# Altium PCB slave_card_pcb.PcbDoc (part 2 of 2)
Units mm, origin at the board's own origin, x right, y up, seen from the top; angles counter-clockwise.
Board outline 165 x 187.5 mm, 4 copper layers (Top Layer, Int1 (GND), Int2 (PWR), Bottom Layer), stack 1.369 mm thick; 87 components, 83 nets, 381 pads, 109 vias.
Unrouted connection lines stored in the file: 1.
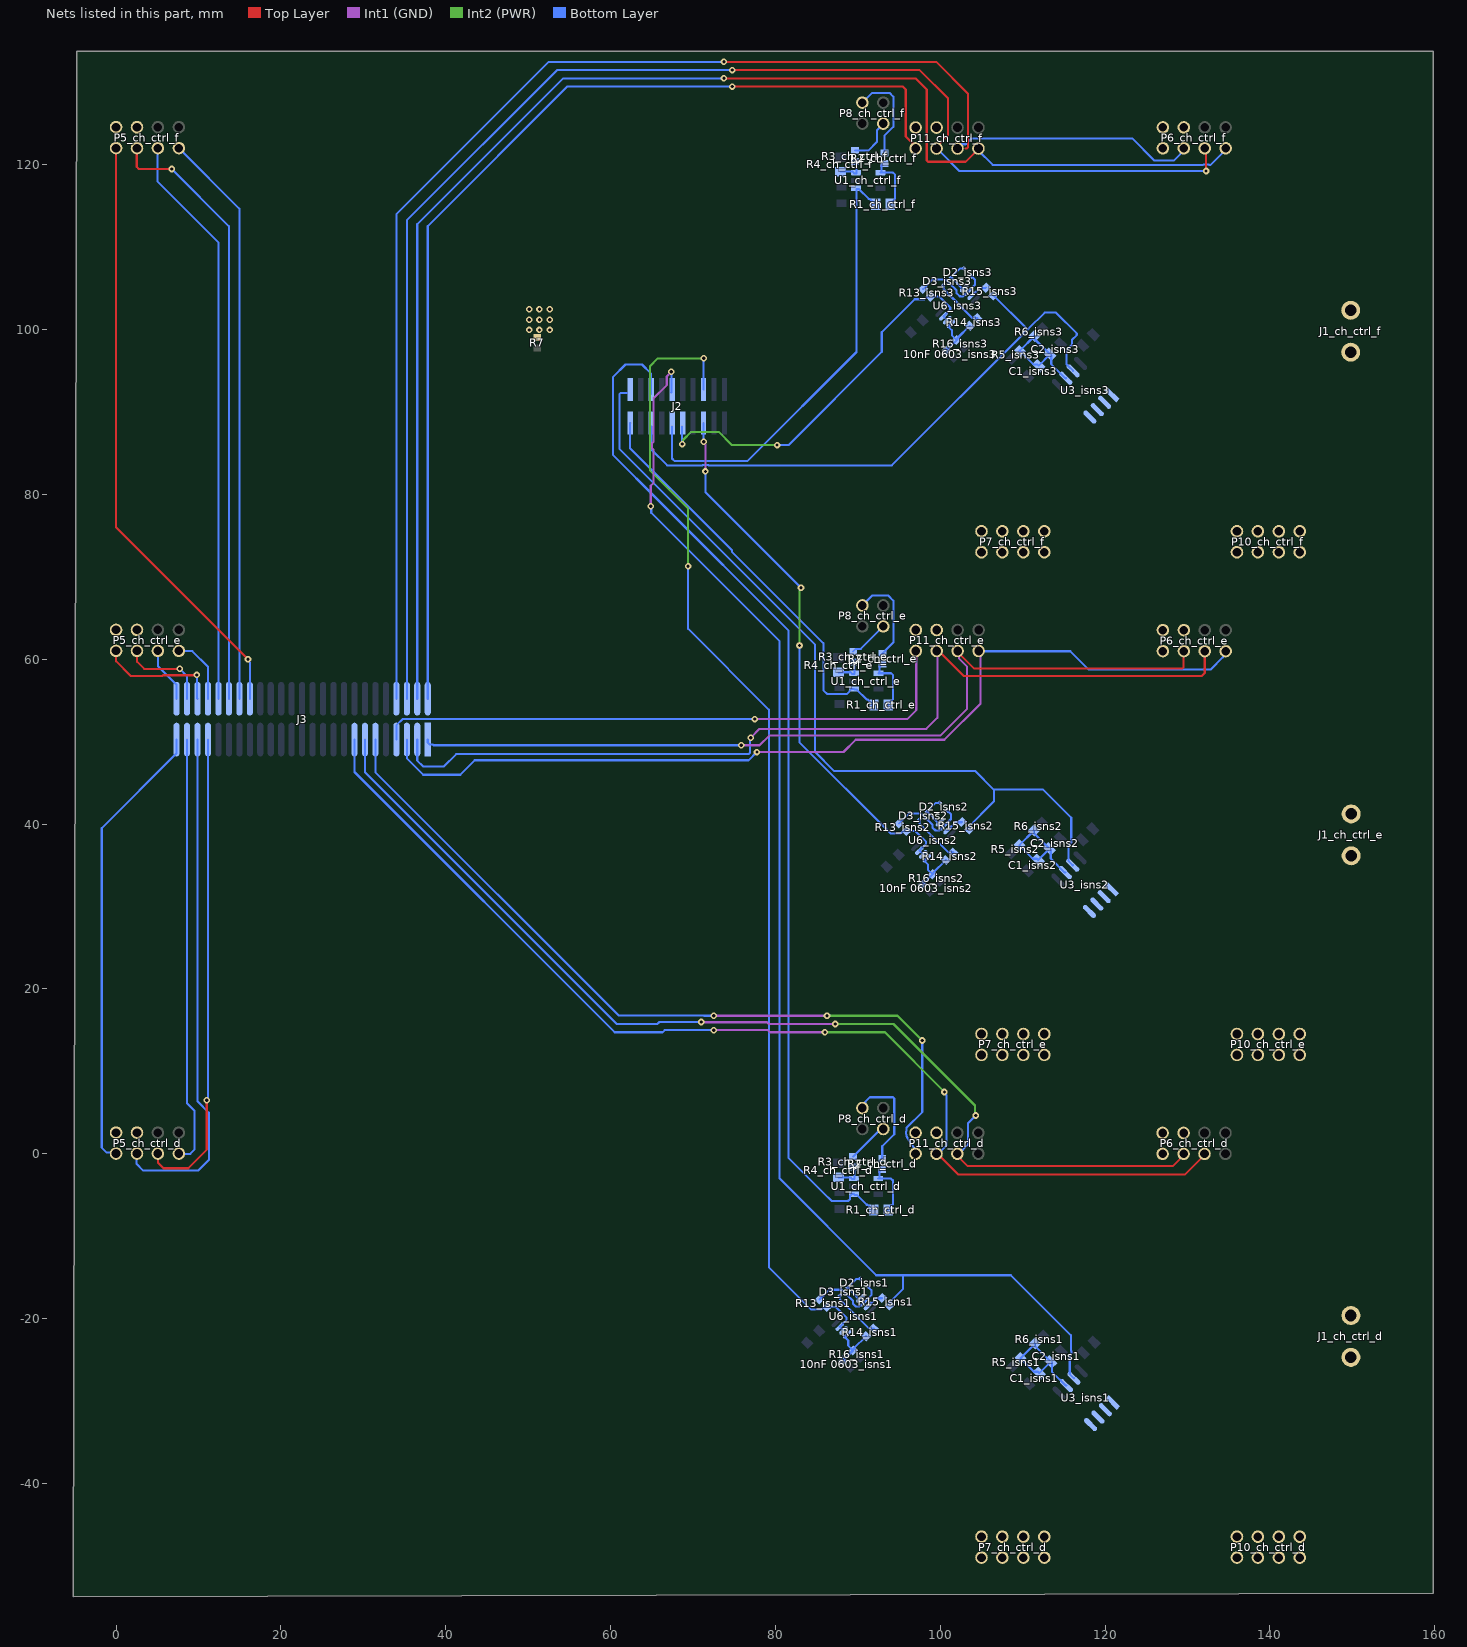
[diagram p4: the nets of this part, all layers, seen from the top]

## Via types
v1: diameter 0.8, hole 0.4, Top Layer to Bottom Layer, 97 vias
v2: diameter 0.8, hole 0.4, Top Layer to Bottom Layer, tented both sides, 12 vias

## Nets (pads, with @x,y where several pads share a name; then routed paths per layer and width w, separated by ;. In a path a pad name is that pad's centre, name@x,y a point inside that pad or via, vN(x,y) a via of type N, cw(c..) or ccw(c..) an arc to the next point about the centre after c; other vN are vias at no path point) (continued)
brdg_en_che: J3.3 P6_ch_ctrl_e.1 P11_ch_ctrl_e.1 | length 114.9
  Int1 (GND) w0.254: v1(77.75,48.75) 88.25,48.75 89.742,50.242 100.492,50.242 104.893,54.643 104.893,60.236 104.891,60.238 104.891,61.069 P11_ch_ctrl_e.1@104.893,61.071
  Bottom Layer w0.254: J3.3@35.27,50.27 35.27,47.98 37.25,46 41.75,46 43.5,47.75 76.75,47.75 v1(77.75,48.75) ; P11_ch_ctrl_e.1@104.837,60.98 115.77,60.98 118,58.75 132.795,58.75 134.284,60.239 134.284,60.309 135.002,61.027 P6_ch_ctrl_e.1@135.072,61.027
brdg_en_chf: J3.49 P6_ch_ctrl_f.1 P11_ch_ctrl_f.1 | length 175.5
  Top Layer w0.254: v1(73.75,130.5) 97,130.5 98.359,129.141 98.359,120.527 98.508,120.378 103.08,120.378 P11_ch_ctrl_f.1@105.064,122.363
  Bottom Layer w0.254: J3.49@36.54,55.22 36.54,112.79 54.25,130.5 v1(73.75,130.5) ; P11_ch_ctrl_f.1@104.559,121.803 106.362,120 131.895,120 131.927,120.031 132.573,120.031 132.601,120.004 132.811,120.004 P6_ch_ctrl_f.1@134.954,122.146
brgd_h_chd: J3.8 P6_ch_ctrl_d.3 P11_ch_ctrl_d.5 | length 134.8
  Top Layer w0.254: P11_ch_ctrl_d.5@99.678,-0.029 102.149,-2.5 129.708,-2.5 P6_ch_ctrl_d.3@132.464,0.256
  Int1 (GND) w0.254: v1(72.5,15) 79.073,15 79.323,14.75 v1(86,14.75)
  Int2 (PWR) w0.254: v1(86,14.75) 93.295,14.75 100.5,7.545 v1(100.5,7.5)
  Bottom Layer w0.254: J3.8@28.92,50.27 28.92,46.33 60.5,14.75 66.301,14.75 66.551,15 v1(72.5,15) ; P11_ch_ctrl_d.5@99.802,0.049 100.773,1.019 100.773,7.08 100.5,7.352 v1(100.5,7.5)
brgd_h_che: J3.2 P6_ch_ctrl_e.3 P11_ch_ctrl_e.5 | length 113.7
  Top Layer w0.254: P11_ch_ctrl_e.5@99.9,60.924 102.824,58 131.75,58 132.087,58.337 P6_ch_ctrl_e.3@132.087,61.041
  Int1 (GND) w0.254: v1(77,50.5) 78.066,51.566 98.316,51.566 99.644,52.894 P11_ch_ctrl_e.5@99.644,60.961
  Bottom Layer w0.254: J3.2@36.54,50.27 36.54,47.71 37.25,47 39.75,47 41.25,48.5 76.75,48.5 76.9,48.65 76.9,50.4 v1(77,50.5)
brgd_h_chf: J3.48 P6_ch_ctrl_f.3 P11_ch_ctrl_f.5 | length 176
  Top Layer w0.254: v1(74.75,131.5) 97.5,131.5 100.947,128.053 100.947,123.604 99.55,122.207 P11_ch_ctrl_f.5@99.55,121.987 ; v1(132.25,119.25) P6_ch_ctrl_f.3@132.25,121.994
  Bottom Layer w0.254: J3.48@35.27,55.22 35.27,113.27 53.5,131.5 v1(74.75,131.5) ; P11_ch_ctrl_f.5@100.048,122.225 99.975,122.152 99.975,121.583 102.308,119.25 v1(132.25,119.25)
brgd_l_chd: J3.7 P6_ch_ctrl_d.5 P11_ch_ctrl_d.3 | length 131
  Top Layer w0.254: P11_ch_ctrl_d.3@101.882,-0.037 103.345,-1.5 128.198,-1.5 P6_ch_ctrl_d.5@129.868,0.17
  Int1 (GND) w0.254: v1(71,16) 71.031,15.969 78.979,15.969 79.198,15.75 v1(87.25,15.75)
  Int2 (PWR) w0.254: v1(87.25,15.75) 94.319,15.75 104.213,5.856 104.213,4.755 v1(104.318,4.651)
  Bottom Layer w0.254: J3.7@30.19,50.27 30.19,46.31 60.75,15.75 65.676,15.75 65.926,16 v1(71,16) ; P11_ch_ctrl_d.3@102.269,0.017 103.353,1.101 103.353,3.686 v1(104.318,4.651)
brgd_l_che: J3.1 P6_ch_ctrl_e.5 P11_ch_ctrl_e.3 | length 106
  Top Layer w0.254: P11_ch_ctrl_e.3@102.44,61.356 102.44,60.56 104.128,58.872 129.38,58.872 129.529,59.021 P6_ch_ctrl_e.5@129.529,61.098
  Int1 (GND) w0.254: v1(75.866,49.571) 78.071,49.571 79.25,50.75 100,50.75 103.25,54 103.25,59.115 102.281,60.085 102.281,60.847 P11_ch_ctrl_e.3@102.108,61.02
  Bottom Layer w0.254: J3.1@37.81,50.27 37.81,49.911 38.053,49.668 38.412,49.668 38.509,49.571 v1(75.866,49.571)
brgd_l_chf: J3.47 P6_ch_ctrl_f.5 P11_ch_ctrl_f.3 | length 174.4
  Top Layer w0.254: v1(73.75,132.5) 99.5,132.5 103.341,128.659 103.341,122.136 103.192,121.987 103.09,121.987
  Bottom Layer w0.254: J3.47@34,55.22 34,114 52.5,132.5 v1(73.75,132.5) ; P11_ch_ctrl_f.3@102.09,121.987 102.602,122.499 103.013,122.499 103.054,122.499 103.093,122.512 ccw(c103.013,122.753) 103.223,122.61 cw(c105.085,121.353) 103.624,123.06 ccw(c103.458,123.252) 103.65,123.085 cw(c103.978,122.799) 103.767,123.18 cw(c103.889,122.958) 103.889,123.212 123.296,123.212 126,120.508 128.309,120.508 P6_ch_ctrl_f.5@129.937,122.135
buck_en_ch_ctrl_d: J3.24 P5_ch_ctrl_d.1 | length 52.2
  Bottom Layer w0.254: P5_ch_ctrl_d.1@7.62,0 9,0 9.5,0.5 9.5,5.25 8.6,6.15 J3.24@8.6,50.27
buck_en_ch_ctrl_e: J3.29 P5_ch_ctrl_e.1 | length 8.2
  Bottom Layer w0.254: P5_ch_ctrl_e.1@7.62,61 9.25,61 11.14,59.11 J3.29@11.14,55.22
buck_en_ch_ctrl_f: J3.32 P5_ch_ctrl_f.1 | length 69.8
  Bottom Layer w0.254: P5_ch_ctrl_f.1@7.62,122 14.95,114.67 J3.32@14.95,55.22
buck_h_ch_ctrl_d: J3.22 P5_ch_ctrl_d.3 | length 58
  Top Layer w0.254: P5_ch_ctrl_d.3@5.08,0 5.08,-1.08 5.75,-1.75 8.75,-1.75 11,0.5 v1(11,6.5)
  Bottom Layer w0.254: v1(11,6.5) 11.14,6.64 J3.22@11.14,50.27
buck_h_ch_ctrl_e: J3.26 P5_ch_ctrl_e.3 | length 6.7
  Bottom Layer w0.254: P5_ch_ctrl_e.3@5.08,61 5.08,59.17 7.33,56.92 J3.26@7.33,55.22
buck_h_ch_ctrl_f: J3.30 P5_ch_ctrl_f.3 | length 69.9
  Bottom Layer w0.254: P5_ch_ctrl_f.3@5.08,122 5,121.92 5,118 12.41,110.59 J3.30@12.41,55.22
buck_l_ch_ctrl_d: J3.23 P5_ch_ctrl_d.5 | length 62.4
  Bottom Layer w0.254: P5_ch_ctrl_d.5@2.54,0 2.484,-0.056 2.484,-1.234 3.25,-2 10,-2 11.25,-0.75 11.25,5 9.87,6.38 J3.23@9.87,50.27
buck_l_ch_ctrl_e: J3.27 P5_ch_ctrl_e.5 | length 10.8
  Top Layer w0.254: P5_ch_ctrl_e.5@2.54,61 2.54,59.71 3.398,58.852 v1(7.716,58.852)
  Bottom Layer w0.254: v1(7.716,58.852) 8.6,57.967 J3.27@8.6,55.22
buck_l_ch_ctrl_f: J3.31 P5_ch_ctrl_f.5 | length 73.8
  Top Layer w0.254: P5_ch_ctrl_f.5@2.54,122 2.5,121.96 2.5,119.75 2.75,119.5 v1(6.75,119.5)
  Bottom Layer w0.254: v1(6.75,119.5) 13.68,112.57 J3.31@13.68,55.22
buck_state_ch_ctrl_d: J3.25 P5_ch_ctrl_d.7 | length 55.3
  Bottom Layer w0.254: P5_ch_ctrl_d.7@0,0 -0.143,0.143 -1.143,0.143 -1.75,0.75 -1.75,39.515 7.33,48.595 J3.25@7.33,50.27
buck_state_ch_ctrl_e: J3.28 P5_ch_ctrl_e.7 | length 14.7
  Top Layer w0.254: P5_ch_ctrl_e.7@0,61 0,59.75 1.75,58 5.641,58 5.711,58.071 9.75,58.071 v1(9.786,58.107)
  Bottom Layer w0.254: v1(9.786,58.107) 9.828,58.065 9.828,55.262 J3.28@9.87,55.22
buck_state_ch_ctrl_f: J3.33 P5_ch_ctrl_f.7 | length 73.5
  Top Layer w0.254: P5_ch_ctrl_f.7@0,122 0,76 v1(16,60)
  Bottom Layer w0.254: v1(16,60) 16,59.852 16.22,59.632 J3.33@16.22,55.22
GND: P5_ch_ctrl_d.6 P5_ch_ctrl_d.8 P5_ch_ctrl_e.6 P5_ch_ctrl_e.8 P5_ch_ctrl_f.6 P5_ch_ctrl_f.8 P6_ch_ctrl_d.6 P6_ch_ctrl_d.8 P6_ch_ctrl_e.6 P6_ch_ctrl_e.8 P6_ch_ctrl_f.6 P6_ch_ctrl_f.8 P11_ch_ctrl_d.6 P11_ch_ctrl_d.8 P11_ch_ctrl_e.6 P11_ch_ctrl_e.8 P11_ch_ctrl_f.6 P11_ch_ctrl_f.8 R7.2
  other v1: 50.11,99.97 51.36,99.97 52.61,99.97 50.11,101.22 51.36,101.22 52.61,101.22 50.11,102.47 51.36,102.47 52.61,102.47
i_sense_isns1: J2.11 R15_isns1.1 U3_isns1.7 | length 161.2
  Int1 (GND) w0.254: v1(64.871,78.562) 64.871,81.058 65.185,81.372 65.185,85.447 65.03,85.602 65.03,86.249 65.185,86.403 65.185,91.645 66.81,93.27 66.81,94.317 67.351,94.857 v1(67.351,94.88)
  Bottom Layer w0.254: v1(64.871,78.562) 64.933,78.5 64.933,77.781 80.5,62.214 80.5,-3 92.23,-14.73 95.5,-14.73 ; J2.11@67.351,92.364 67.405,92.419 67.405,94.826 v1(67.351,94.88) ; R15_isns1.1@93.869,-18.414 93.869,-17.992 95.5,-16.362 95.5,-14.73 ; U3_isns1.7@116.208,-27.232 115.713,-26.737 115.713,-24.444 115.907,-24.25 115.907,-23.934 115.85,-23.877 115.85,-22.02 108.56,-14.73 95.5,-14.73
i_sense_isns2: J2.19 R15_isns2.1 U3_isns2.7 | length 101.1
  Bottom Layer w0.254: 62,92.334 61.209,92.334 61.06,92.185 61.06,85.537 84.81,61.787 84.81,48.756 87.091,46.476 104.219,46.476 106.5,44.195 ; R15_isns2.1@103.523,39.351 103.399,39.351 103.25,39.5 106.5,42.75 106.5,44.195 ; U3_isns2.7@116.07,35.02 115.575,35.515 115.575,37.406 115.893,37.723 115.893,40.785 112.483,44.195 106.5,44.195
i_sense_isns3: J2.16 R15_isns3.1 U3_isns3.7 | length 75.3
  Bottom Layer w0.254: J2.16@64.946,88.249 64.946,85.461 66.873,83.534 71.129,83.534 71.176,83.581 71.823,83.581 71.871,83.534 94.124,83.534 110.607,100.017 110.695,100.105 ; R15_isns3.1@106.442,104.182 110.519,100.105 110.695,100.105 ; U3_isns3.7@116.127,95.008 115.565,95.57 115.56,95.57 115.31,95.82 115.31,97.475 115.985,98.15 115.985,98.77 116.555,99.34 116.555,99.55 114.035,102.07 112.66,102.07 110.695,100.105
i_sense_peak_d: J2.5 R13_isns1.2 U6_isns1.6 U6_isns1.7 | length 140.2
  Int2 (PWR) w0.254: v1(69.4,71.3) 69.4,78.3 64.8,82.9 64.8,95.6 65.717,96.517 71.036,96.517 v1@71.1,96.58
  Bottom Layer w0.254: v1(69.4,71.3) 69.4,63.7 79.2,53.9 79.2,-13.771 84.331,-18.902 85.535,-18.902 85.847,-18.591 R13_isns1.2@86.268,-18.591 86.303,-18.555 86.725,-18.555 86.76,-18.591 87.329,-18.591 88.637,-19.899 88.637,-20.155 U6_isns1.7@87.846,-20.946 ; J2.5@71.27,92.73 71.279,92.739 71.279,96.507 v1(71.288,96.517) ; U6_isns1.7@87.806,-20.977 87.815,-20.977 U6_isns1.7@87.846,-20.946 ; U6_isns1.6@88.266,-21.437 87.846,-21.017 U6_isns1.7@87.846,-20.946
i_sense_peak_e: J2.6 R13_isns2.2 U6_isns2.6 U6_isns2.7 | length 66.5
  Int1 (GND) w0.254: v1(71.282,86.406) 71.282,86.258 71.5,86.04 v1(71.5,82.8)
  Int2 (PWR) w0.254: v1(82.914,61.675) 82.914,68.514 v1(83.1,68.7)
  Bottom Layer w0.254: J2.6@71.27,88.666 71.276,88.66 71.276,86.412 v1(71.282,86.406) ; v1(71.5,82.8) 71.5,80.3 v1(83.1,68.7) ; v1(82.914,61.675) 82.9,61.689 82.9,49.948 93.984,38.863 95.189,38.863 95.5,39.175 R13_isns2.2@95.922,39.175 95.957,39.21 96.378,39.21 96.414,39.175 96.982,39.175 98.29,37.866 98.29,37.61 U6_isns2.7@97.499,36.819 ; U6_isns2.7@97.46,36.788 97.468,36.788 U6_isns2.7@97.499,36.819 ; U6_isns2.6@97.919,36.329 97.499,36.749 U6_isns2.7@97.499,36.819
i_sense_peak_f: J2.10 R13_isns3.2 U6_isns3.6 U6_isns3.7 | length 47.7
  Int2 (PWR) w0.254: v1(68.688,86.117) 68.789,86.217 68.789,86.613 69.776,87.6 73.1,87.6 74.7,86 v1(80.2,86)
  Bottom Layer w0.254: J2.10@68.665,88.256 68.665,86.14 v1(68.688,86.117) ; v1(80.2,86) 81.6,86 92.9,97.3 92.9,99.691 96.903,103.694 98.108,103.694 98.419,104.005 R13_isns3.2@98.841,104.005 98.876,104.041 99.298,104.041 99.333,104.005 99.901,104.005 101.21,102.697 101.21,102.441 U6_isns3.7@100.418,101.65 ; U6_isns3.7@100.379,101.619 100.387,101.619 U6_isns3.7@100.418,101.65 ; U6_isns3.6@100.838,101.159 100.418,101.579 U6_isns3.7@100.418,101.65
lega_chd_state: P6_ch_ctrl_d.7
lega_che_state: P6_ch_ctrl_e.7
lega_chf_state: P6_ch_ctrl_f.7
legb_chd_state: J3.6 P11_ch_ctrl_d.7 | length 99
  Int1 (GND) w0.254: v1(72.5,16.75) v1(86.25,16.75)
  Int2 (PWR) w0.254: v1(86.25,16.75) 94.813,16.75 v1(97.81,13.753)
  Bottom Layer w0.254: J3.6@31.46,50.27 31.46,46.29 60.969,16.781 71.323,16.781 71.355,16.75 v1(72.5,16.75) ; 95.956,2.051 95.89,2.118 95.89,2.274 cw(c96.999,2.549) 95.89,2.824 95.89,3.14 97.81,5.06 v1(97.81,13.753) ; 95.957,2.05 95.984,2.024 ccw(c103.258,5.788) 97.357,0.108 97.357,-0.001 P11_ch_ctrl_d.7@97.467,-0.004
legb_che_state: J3.4 P11_ch_ctrl_e.7 | length 72.8
  Int1 (GND) w0.254: v1(77.5,52.75) 96,52.75 97.081,53.831 P11_ch_ctrl_e.7@97.081,61.057
  Bottom Layer w0.254: J3.4@34,50.27 34,52 34.75,52.75 v1(77.5,52.75)
legb_chf_state: J3.50 P11_ch_ctrl_f.7 | length 130.6
  Top Layer w0.254: v1(74.75,129.5) 95.459,129.5 95.81,129.148 95.81,123.44 97.263,121.987 P11_ch_ctrl_f.7@97.01,121.987 P11_ch_ctrl_f.7@96.914,121.987
  Bottom Layer w0.254: J3.50@37.81,55.22 37.81,112.56 54.75,129.5 v1(74.75,129.5)
"Net10nF 0603_isns1_2": "10nF 0603_isns1.2" R14_isns1.2 R16_isns1.2 U6_isns1.5 | length 6.6
  Bottom Layer w0.254: 88.177,-25.096 R16_isns1.2@89.415,-23.858 ; U6_isns1.5@88.725,-21.896 88.469,-22.153 88.469,-22.281 88.833,-22.645 88.833,-23.277 R16_isns1.2@89.415,-23.858 ; R14_isns1.2@91.006,-22.126 89.521,-23.611 89.521,-23.752 R16_isns1.2@89.415,-23.858
"Net10nF 0603_isns2_2": "10nF 0603_isns2.2" R14_isns2.2 R16_isns2.2 U6_isns2.5 | length 6.6
  Bottom Layer w0.254: 97.831,32.669 R16_isns2.2@99.068,33.907 ; U6_isns2.5@98.379,35.869 98.122,35.612 98.122,35.484 98.487,35.12 98.487,34.488 R16_isns2.2@99.068,33.907 ; R14_isns2.2@100.659,35.639 99.174,34.154 99.174,34.013 R16_isns2.2@99.068,33.907
"Net10nF 0603_isns3_2": "10nF 0603_isns3.2" R14_isns3.2 R16_isns3.2 U6_isns3.5 | length 6.6
  Bottom Layer w0.254: 100.75,97.5 R16_isns3.2@101.987,98.737 ; U6_isns3.5@101.298,100.7 101.041,100.443 101.041,100.315 101.406,99.95 101.406,99.319 R16_isns3.2@101.987,98.737 ; R14_isns3.2@103.578,100.47 102.094,98.985 102.094,98.844 R16_isns3.2@101.987,98.737
NetC1_isns1_1: C1_isns1.1 C2_isns1.2 R5_isns1.1 R6_isns1.2 U3_isns1.6 | length 14.2
  Bottom Layer w0.254: U3_isns1.6@115.31,-28.13 115.252,-28.13 113.546,-26.424 113.546,-25.4 C2_isns1.2@113.387,-25.241 ; C2_isns1.2@113.387,-25.241 111.513,-23.367 R6_isns1.2@111.513,-23.014 R5_isns1.1@109.728,-24.799 111.372,-26.443 111.867,-26.443 C1_isns1.1@112.026,-26.603 C2_isns1.2@113.387,-25.241
NetC1_isns2_1: C1_isns2.1 C2_isns2.2 R5_isns2.1 R6_isns2.2 U3_isns2.6 | length 14.2
  Bottom Layer w0.254: U3_isns2.6@115.172,34.122 115.115,34.122 113.409,35.828 113.409,36.852 C2_isns2.2@113.25,37.011 ; C2_isns2.2@113.25,37.011 111.376,38.884 R6_isns2.2@111.376,39.238 R5_isns2.1@109.59,37.453 111.234,35.809 111.729,35.809 C1_isns2.1@111.888,35.649 C2_isns2.2@113.25,37.011
NetC1_isns3_1: C1_isns3.1 C2_isns3.2 R5_isns3.1 R6_isns3.2 U3_isns3.6 | length 14.2
  Bottom Layer w0.254: U3_isns3.6@115.228,94.11 115.171,94.11 113.465,95.816 113.465,96.84 C2_isns3.2@113.306,96.999 ; C2_isns3.2@113.306,96.999 C1_isns3.1@111.944,95.638 111.785,95.797 111.29,95.797 R5_isns3.1@109.646,97.441 R6_isns3.2@111.432,99.226 111.432,98.873 C2_isns3.2@113.306,96.999
NetD2_isns1_1: D2_isns1.1 D3_isns1.2 U6_isns1.1 | length 4.2
  Bottom Layer w0.254: D2_isns1.1@90.291,-15.189 90.263,-15.161 90.16,-15.161 90.132,-15.189 89.811,-15.189 D3_isns1.2@88.75,-16.25 90.118,-17.618 90.246,-17.618 U6_isns1.1@90.316,-17.548
NetD2_isns1_2: D2_isns1.2 R13_isns1.1 U6_isns1.2 | length 9.6
  Bottom Layer w0.254: R13_isns1.1@85.349,-17.671 86.529,-16.491 88.06,-16.491 89.41,-17.841 89.41,-18.182 89.768,-18.54 90.19,-18.54 90.723,-18.007 U6_isns1.2@90.776,-18.007 91.642,-17.141 91.642,-16.54 D2_isns1.2@91.225,-16.123
NetD2_isns2_1: D2_isns2.1 D3_isns2.2 U6_isns2.1 | length 4.2
  Bottom Layer w0.254: D2_isns2.1@99.945,42.576 99.917,42.604 99.813,42.604 99.785,42.576 99.464,42.576 D3_isns2.2@98.404,41.515 99.771,40.147 99.899,40.147 U6_isns2.1@99.97,40.218
NetD2_isns2_2: D2_isns2.2 R13_isns2.1 U6_isns2.2 | length 9.6
  Bottom Layer w0.254: R13_isns2.1@95.002,40.094 96.182,41.274 97.713,41.274 99.063,39.924 99.063,39.584 99.422,39.225 99.843,39.225 100.376,39.758 U6_isns2.2@100.429,39.758 101.296,40.624 101.296,41.225 D2_isns2.2@100.878,41.642
NetD2_isns3_1: D2_isns3.1 D3_isns3.2 U6_isns3.1 | length 4.2
  Bottom Layer w0.254: D2_isns3.1@102.864,107.407 102.836,107.435 102.733,107.435 102.704,107.407 102.383,107.407 D3_isns3.2@101.323,106.346 102.691,104.978 102.819,104.978 U6_isns3.1@102.889,105.048
NetD2_isns3_2: D2_isns3.2 R13_isns3.1 U6_isns3.2 | length 9.6
  Bottom Layer w0.254: R13_isns3.1@97.922,104.925 99.102,106.105 100.633,106.105 101.982,104.755 101.982,104.414 102.341,104.056 102.763,104.056 103.296,104.589 U6_isns3.2@103.349,104.589 104.215,105.455 104.215,106.056 D2_isns3.2@103.798,106.473
NetD3_isns1_1: D3_isns1.1 R14_isns1.1 | length 6.1
  Bottom Layer w0.254: D3_isns1.1@87.817,-17.183 87.788,-17.212 87.788,-17.315 87.817,-17.343 87.817,-17.661 91.327,-21.171 91.89,-21.171 R14_isns1.1@91.925,-21.207
NetD3_isns2_1: D3_isns2.1 R14_isns2.1 | length 6.1
  Bottom Layer w0.254: D3_isns2.1@97.47,40.582 97.442,40.553 97.442,40.45 97.47,40.422 97.47,40.104 100.98,36.594 101.543,36.594 R14_isns2.1@101.578,36.558
NetD3_isns3_1: D3_isns3.1 R14_isns3.1 | length 6.1
  Bottom Layer w0.254: D3_isns3.1@100.389,105.413 100.361,105.384 100.361,105.281 100.389,105.253 100.389,104.935 103.9,101.424 104.462,101.424 R14_isns3.1@104.498,101.389
NetJ1_ch_ctrl_d_1: J1_ch_ctrl_d.1 P10_ch_ctrl_d.1 P10_ch_ctrl_d.2 P10_ch_ctrl_d.3 P10_ch_ctrl_d.4 P10_ch_ctrl_d.5 P10_ch_ctrl_d.6 P10_ch_ctrl_d.7 P10_ch_ctrl_d.8
NetJ1_ch_ctrl_d_2: J1_ch_ctrl_d.2 U3_isns1.1 U3_isns1.2
NetJ1_ch_ctrl_e_1: J1_ch_ctrl_e.1 P10_ch_ctrl_e.1 P10_ch_ctrl_e.2 P10_ch_ctrl_e.3 P10_ch_ctrl_e.4 P10_ch_ctrl_e.5 P10_ch_ctrl_e.6 P10_ch_ctrl_e.7 P10_ch_ctrl_e.8
NetJ1_ch_ctrl_e_2: J1_ch_ctrl_e.2 U3_isns2.1 U3_isns2.2
NetJ1_ch_ctrl_f_1: J1_ch_ctrl_f.1 P10_ch_ctrl_f.1 P10_ch_ctrl_f.2 P10_ch_ctrl_f.3 P10_ch_ctrl_f.4 P10_ch_ctrl_f.5 P10_ch_ctrl_f.6 P10_ch_ctrl_f.7 P10_ch_ctrl_f.8
NetJ1_ch_ctrl_f_2: J1_ch_ctrl_f.2 U3_isns3.1 U3_isns3.2
NetP7_ch_ctrl_d_1: P7_ch_ctrl_d.1 P7_ch_ctrl_d.2 P7_ch_ctrl_d.3 P7_ch_ctrl_d.4 P7_ch_ctrl_d.5 P7_ch_ctrl_d.6 P7_ch_ctrl_d.7 P7_ch_ctrl_d.8 U3_isns1.3 U3_isns1.4
NetP7_ch_ctrl_e_1: P7_ch_ctrl_e.1 P7_ch_ctrl_e.2 P7_ch_ctrl_e.3 P7_ch_ctrl_e.4 P7_ch_ctrl_e.5 P7_ch_ctrl_e.6 P7_ch_ctrl_e.7 P7_ch_ctrl_e.8 U3_isns2.3 U3_isns2.4
NetP7_ch_ctrl_f_1: P7_ch_ctrl_f.1 P7_ch_ctrl_f.2 P7_ch_ctrl_f.3 P7_ch_ctrl_f.4 P7_ch_ctrl_f.5 P7_ch_ctrl_f.6 P7_ch_ctrl_f.7 P7_ch_ctrl_f.8 U3_isns3.3 U3_isns3.4
NetR1_ch_ctrl_d_1: R1_ch_ctrl_d.1 R2_ch_ctrl_d.2 U1_ch_ctrl_d.4 | length 6.9
  Bottom Layer w0.254: U1_ch_ctrl_d.4@92.472,-2.987 92.614,-2.987 94.009,-2.987 94.259,-3.238 94.259,-6.136 93.679,-6.716 R1_ch_ctrl_d.1@93.679,-6.816 ; U1_ch_ctrl_d.4@92.614,-2.879 92.614,-2.176 92.912,-1.878 R2_ch_ctrl_d.2@92.962,-1.878
NetR1_ch_ctrl_e_1: R1_ch_ctrl_e.1 R2_ch_ctrl_e.2 U1_ch_ctrl_e.4 | length 6.9
  Bottom Layer w0.254: U1_ch_ctrl_e.4@92.499,58.309 92.641,58.309 94.036,58.309 94.286,58.058 94.286,55.16 93.706,54.58 R1_ch_ctrl_e.1@93.706,54.48 ; U1_ch_ctrl_e.4@92.641,58.417 92.641,59.12 92.939,59.418 R2_ch_ctrl_e.2@92.989,59.418
NetR1_ch_ctrl_f_1: R1_ch_ctrl_f.1 R2_ch_ctrl_f.2 U1_ch_ctrl_f.4 | length 6.9
  Bottom Layer w0.254: U1_ch_ctrl_f.4@92.729,119.055 92.871,119.055 94.266,119.055 94.516,118.805 94.516,115.906 93.936,115.326 R1_ch_ctrl_f.1@93.936,115.226 ; U1_ch_ctrl_f.4@92.871,119.163 92.871,119.866 93.169,120.164 R2_ch_ctrl_f.2@93.219,120.164
NetR3_ch_ctrl_d_2: R3_ch_ctrl_d.2 R4_ch_ctrl_d.2 U1_ch_ctrl_d.3 | length 3.6
  Bottom Layer w0.254: R4_ch_ctrl_d.2@87.628,-2.865 89.1,-2.865 89.307,-3.072 89.582,-3.072 89.582,-1.8 R3_ch_ctrl_d.2@89.406,-1.624
NetR3_ch_ctrl_e_2: R3_ch_ctrl_e.2 R4_ch_ctrl_e.2 U1_ch_ctrl_e.3 | length 3.6
  Bottom Layer w0.254: R4_ch_ctrl_e.2@87.655,58.431 89.127,58.431 89.334,58.224 89.609,58.224 89.609,59.496 R3_ch_ctrl_e.2@89.433,59.672
NetR3_ch_ctrl_f_2: R3_ch_ctrl_f.2 R4_ch_ctrl_f.2 U1_ch_ctrl_f.3 | length 3.6
  Bottom Layer w0.254: R4_ch_ctrl_f.2@87.885,119.177 89.357,119.177 89.564,118.97 89.839,118.97 89.839,120.242 R3_ch_ctrl_f.2@89.663,120.418
NetR15_isns1_2: R15_isns1.2 U6_isns1.3 | length 2.1
  Bottom Layer w0.254: U6_isns1.3@91.235,-18.467 91.289,-18.467 92.099,-17.656 92.254,-17.501 92.465,-17.501 92.493,-17.53 92.915,-17.53 R15_isns1.2@92.95,-17.495
NetR15_isns2_2: R15_isns2.2 U6_isns2.3 | length 2.1
  Bottom Layer w0.254: U6_isns2.3@100.889,39.298 100.942,39.298 101.753,40.109 101.908,40.264 102.118,40.264 102.147,40.235 102.568,40.235 R15_isns2.2@102.604,40.271
NetR15_isns3_2: R15_isns3.2 U6_isns3.3 | length 2.1
  Bottom Layer w0.254: U6_isns3.3@103.808,104.129 103.861,104.129 104.672,104.94 104.827,105.095 105.037,105.095 105.066,105.066 105.488,105.066 R15_isns3.2@105.523,105.101
vdcmm_ch_ctrl_d: P8_ch_ctrl_d.3 R3_ch_ctrl_d.1 | length 5.1
  Bottom Layer w0.254: R3_ch_ctrl_d.1@89.406,-0.324 89.456,-0.324 92.794,3.014 P8_ch_ctrl_d.3@93.083,3.014
vdcmm_ch_ctrl_e: P8_ch_ctrl_e.3 R3_ch_ctrl_e.1 | length 4.9
  Bottom Layer w0.254: R3_ch_ctrl_e.1@89.433,60.972 89.731,61.27 90.354,61.27 P8_ch_ctrl_e.3@93.083,63.999
vdcmm_ch_ctrl_f: P8_ch_ctrl_f.3 R3_ch_ctrl_f.1 | length 5.6
  Bottom Layer w0.254: R3_ch_ctrl_f.1@89.663,121.718 91.258,121.718 92.31,122.77 92.31,124.166 93.083,124.939 P8_ch_ctrl_f.3@93.083,125.01
vdcmp_ch_ctrl_d: P8_ch_ctrl_d.2 R2_ch_ctrl_d.1 | length 12.6
  Bottom Layer w0.254: P8_ch_ctrl_d.2@90.543,5.554 90.543,5.897 90.896,6.25 90.896,6.309 91.448,6.861 94.267,6.861 94.416,6.712 94.416,2.376 92.962,0.922 R2_ch_ctrl_d.1@92.962,-0.578
vdcmp_ch_ctrl_e: P8_ch_ctrl_e.2 R2_ch_ctrl_e.1 | length 11.5
  Bottom Layer w0.254: P8_ch_ctrl_e.2@90.543,66.539 91.774,67.77 93.661,67.77 94.31,67.121 94.31,62.039 93.337,61.066 93.337,61.016 93.039,60.718 R2_ch_ctrl_e.1@92.989,60.718
vdcmp_ch_ctrl_f: P8_ch_ctrl_f.2 R2_ch_ctrl_f.1 | length 11.7
  Bottom Layer w0.254: P8_ch_ctrl_f.2@90.543,127.55 91.735,128.742 93.838,128.742 94.31,128.27 94.31,124.621 93.219,123.53 R2_ch_ctrl_f.1@93.219,121.464
vsense_chd: J2.15 R1_ch_ctrl_d.2 U1_ch_ctrl_d.1 | length 125.3
  Bottom Layer w0.254: J2.15@64.883,92.215 64.883,94.697 63.81,95.77 61.81,95.77 60.31,94.27 60.31,84.77 65.81,79.27 81.605,63.475 81.605,-0.525 85.81,-4.73 86.81,-5.73 88.81,-5.73 89.049,-5.491 89.049,-5.085 89.247,-4.887 U1_ch_ctrl_d.1@89.522,-4.887 ; U1_ch_ctrl_d.1@89.582,-4.972 89.857,-4.972 91.057,-6.172 91.057,-6.181 91.171,-6.181 91.706,-6.716 R1_ch_ctrl_d.2@91.706,-6.816
vsense_che: J2.20 R1_ch_ctrl_e.2 U1_ch_ctrl_e.1 | length 49.3
  Bottom Layer w0.254: J2.20@62.38,88.666 62.345,88.631 62.345,85.633 74.708,73.27 74.708,73.074 85.81,61.972 85.81,56.27 86.31,55.77 88.635,55.77 89.274,56.409 U1_ch_ctrl_e.1@89.549,56.409 ; U1_ch_ctrl_e.1@89.609,56.324 89.884,56.324 91.084,55.124 91.084,55.115 91.198,55.115 91.733,54.58 R1_ch_ctrl_e.2@91.733,54.48
vsense_chf: J2.12 R1_ch_ctrl_f.2 U1_ch_ctrl_f.1 | length 54.6
  Bottom Layer w0.254: J2.12@67.442,88.221 67.442,84.375 67.775,84.042 70.919,84.042 70.966,84.089 72.034,84.089 72.081,84.042 76.582,84.042 89.839,97.299 89.839,117.07 90.114,117.07 91.314,115.87 91.314,115.861 91.428,115.861 91.963,115.326 R1_ch_ctrl_f.2@91.963,115.226
¬rel_en_chf: 
¬rel_en_d: 
¬rel_en_e: 
pads on no net: J3.9 J3.10 J3.11 J3.12 J3.13 J3.14 J3.15 J3.16 J3.17 J3.18 J3.19 J3.20 J3.21 J3.34 J3.35 J3.36 J3.37 J3.38 J3.39 J3.40 J3.41 J3.42 J3.43 J3.44 J3.45 J3.46

## Polygon pours and split planes (outlines as drawn)
AGND on Top Layer "NONET_L02_P-001" (solid, pour order 0): 122.164,99.453 117.164,104.453 110.492,110.173 100.8,109.8 91.953,100.953 78.164,100.953 78.164,69.453 88.164,69.453 110.164,91.453 114.164,91.453
AGND on Top Layer "NONET_L02_P-001" (solid, pour order 2): 78.164,70.453 94.164,75.453 94.164,47.754 100.357,47.754 122.312,43.846 109.164,30.453 104.651,25.079 100.357,24.754 94.164,24.754 94.164,-33.547 78.164,-33.547
AGND on Top Layer "NONET_L02_P-001" (solid, pour order 1): 121.427,-21.809 117.164,-17.547 112.164,-12.121 86.62,-12.121 86.62,-33.547 109.689,-33.547
GND on Top Layer "NONET_L01_P-001" (solid, pour order 31): 49,98.633 49,103.4 53.25,103.4 53.25,98.633
AGND on Top Layer "NONET_L02_P-001" (solid, pour order 3): 47.456,98.27 82.681,98.27 82.681,73 47.456,73
AGND on Top Layer "NONET_L02_P-001" (solid, pour order 4): 86.164,128.698 95.164,128.698 95.164,100.453 86.164,100.453
+3.3 on Int1 (GND) "NONET_L02_P-001" (solid, pour order 16): 80.088,68.428 102.088,68.428 102.088,65.428 137.095,65.573 137.095,59.573 135.079,57.27 80.088,57.27 80.088,59.573
+3.3 on Int1 (GND) "NONET_L02_P-001" (solid, pour order 15): 84.81,133.27 84.81,-36.73 -2.69,-36.73 -2.69,133.27
+5 on Int1 (GND) "NONET_L02_P-001" (solid, pour order 13): 67.81,96.678 86.81,96.678 86.81,126.377 94.81,126.377 94.81,105.6 99.5,105.6 99.5,95.6 94.81,95.6 94.81,43.71 98.81,43.71 105.5,43.71 105.5,29.1 98.81,29.1 98.81,7.25 94.81,7.25 94.81,-25.23 94.81,-29.23 67.81,-29.23 67.81,11.77 84.81,11.77 84.81,36.77 67.81,36.77 67.81,56.77 67.81,84.486
+3.3 on Int1 (GND) "NONET_L02_P-001" (solid, pour order 14): 79.81,133.27 118.81,133.27 118.81,126.341 136.816,126.415 136.816,120.415 134.938,118.27 79.81,118.27 79.81,120.415
+3.3 on Int1 (GND) "NONET_L02_P-001" (solid, pour order 30): 80.184,7.033 102.184,7.033 102.184,4.033 137.191,4.178 137.191,-3.23 80.184,-3.23
GND on Int2 (PWR) "NONET_L02_P-001" (solid, pour order 17): -2.69,133.27 84.81,133.27 84.81,103.77 54.27,103.77 54.246,99.25 46.31,99.25 46.31,95.81 46.31,76.27 84.81,76.27 95,76.27 95,40.25 84.81,40.25 84.81,-36.73 -2.69,-36.73
GND on Int2 (PWR) "NONET_L02_P-001" (solid, pour order 20): 79.803,129.262 101.803,129.262 101.803,126.262 136.809,126.407 136.809,120.407 79.803,120.407
GND on Int2 (PWR) "NONET_L02_P-001" (solid, pour order 18): 80.311,7.142 102.311,7.142 102.311,4.142 137.318,4.287 137.318,-10 80.311,-10
GND on Int2 (PWR) "NONET_L02_P-001" (solid, pour order 19): 79.874,76.27 101.874,76.27 101.874,64.997 136.881,65.142 136.881,58 106.75,58 106.824,49.107 79.737,49.025 79.874,58
NetP7_ch_ctrl_d_1 on Bottom Layer "NONET_L02_P-001" (solid, pour order 27): 103.8,-50.73 114.81,-50.73 114.81,-39.73 120.902,-33.638 118.433,-31.169 103.8,-45.802
NetJ1_ch_ctrl_f_1 on Bottom Layer "NONET_L02_P-001" (solid, pour order 23): 151.718,71.181 151.718,98.181 147.718,98.181 134.6,79.597 134.6,71.181
NetP7_ch_ctrl_f_1 on Bottom Layer "NONET_L02_P-001" (solid, pour order 21): 103.7,71.27 114.81,71.27 114.81,82.27 121.092,88.552 118.478,91.165 103.7,76.387
NetJ1_ch_ctrl_f_2 on Bottom Layer "NONET_L02_P-001" (solid, pour order 22): 121.586,89.111 118.969,91.728 121.86,94.62 123.81,95.27 132.81,104.27 151.81,104.27 151.81,100.27 145.81,100.27
NetJ1_ch_ctrl_d_2 on Bottom Layer "NONET_L02_P-001" (solid, pour order 28): 121.432,-32.96 118.995,-30.523 122.277,-27.241 123.81,-26.73 132.81,-17.73 151.81,-17.73 151.81,-21.73 145.81,-21.73
NetJ1_ch_ctrl_d_1 on Bottom Layer "NONET_L02_P-001" (solid, pour order 29): 151.753,-50.765 151.753,-23.765 147.753,-23.765 134.5,-42.541 134.5,-50.765
NetP7_ch_ctrl_e_1 on Bottom Layer "NONET_L02_P-001" (solid, pour order 24): 103.7,10.27 114.81,10.27 114.81,21.27 121.604,28.064 118.661,31.006 103.7,16.045
NetJ1_ch_ctrl_e_1 on Bottom Layer "NONET_L02_P-001" (solid, pour order 26): 151.79,10.333 151.79,37.333 147.79,37.333 134.5,18.506 134.5,10.333
NetJ1_ch_ctrl_e_2 on Bottom Layer "NONET_L02_P-001" (solid, pour order 25): 122.206,28.396 119.071,31.531 120.81,33.27 123.81,34.27 132.81,43.27 151.81,43.27 151.81,39.27 145.81,39.27

## Silkscreen, mask and mechanical layers (free items; w line width, h text height)
Mechanical 1:
  text "[x] Checked Mechanical Positioining of Connectors and Locked Positions" at -2.046,136.262 h1.52